# Altium PCB 平衡车.PcbDoc
Units mm, origin at the board's own origin, x right, y up, seen from the top; angles counter-clockwise.
Board outline 80 x 70 mm, 2 copper layers (Top Layer, Bottom Layer); 11 components, 28 nets, 91 pads, 9 vias.
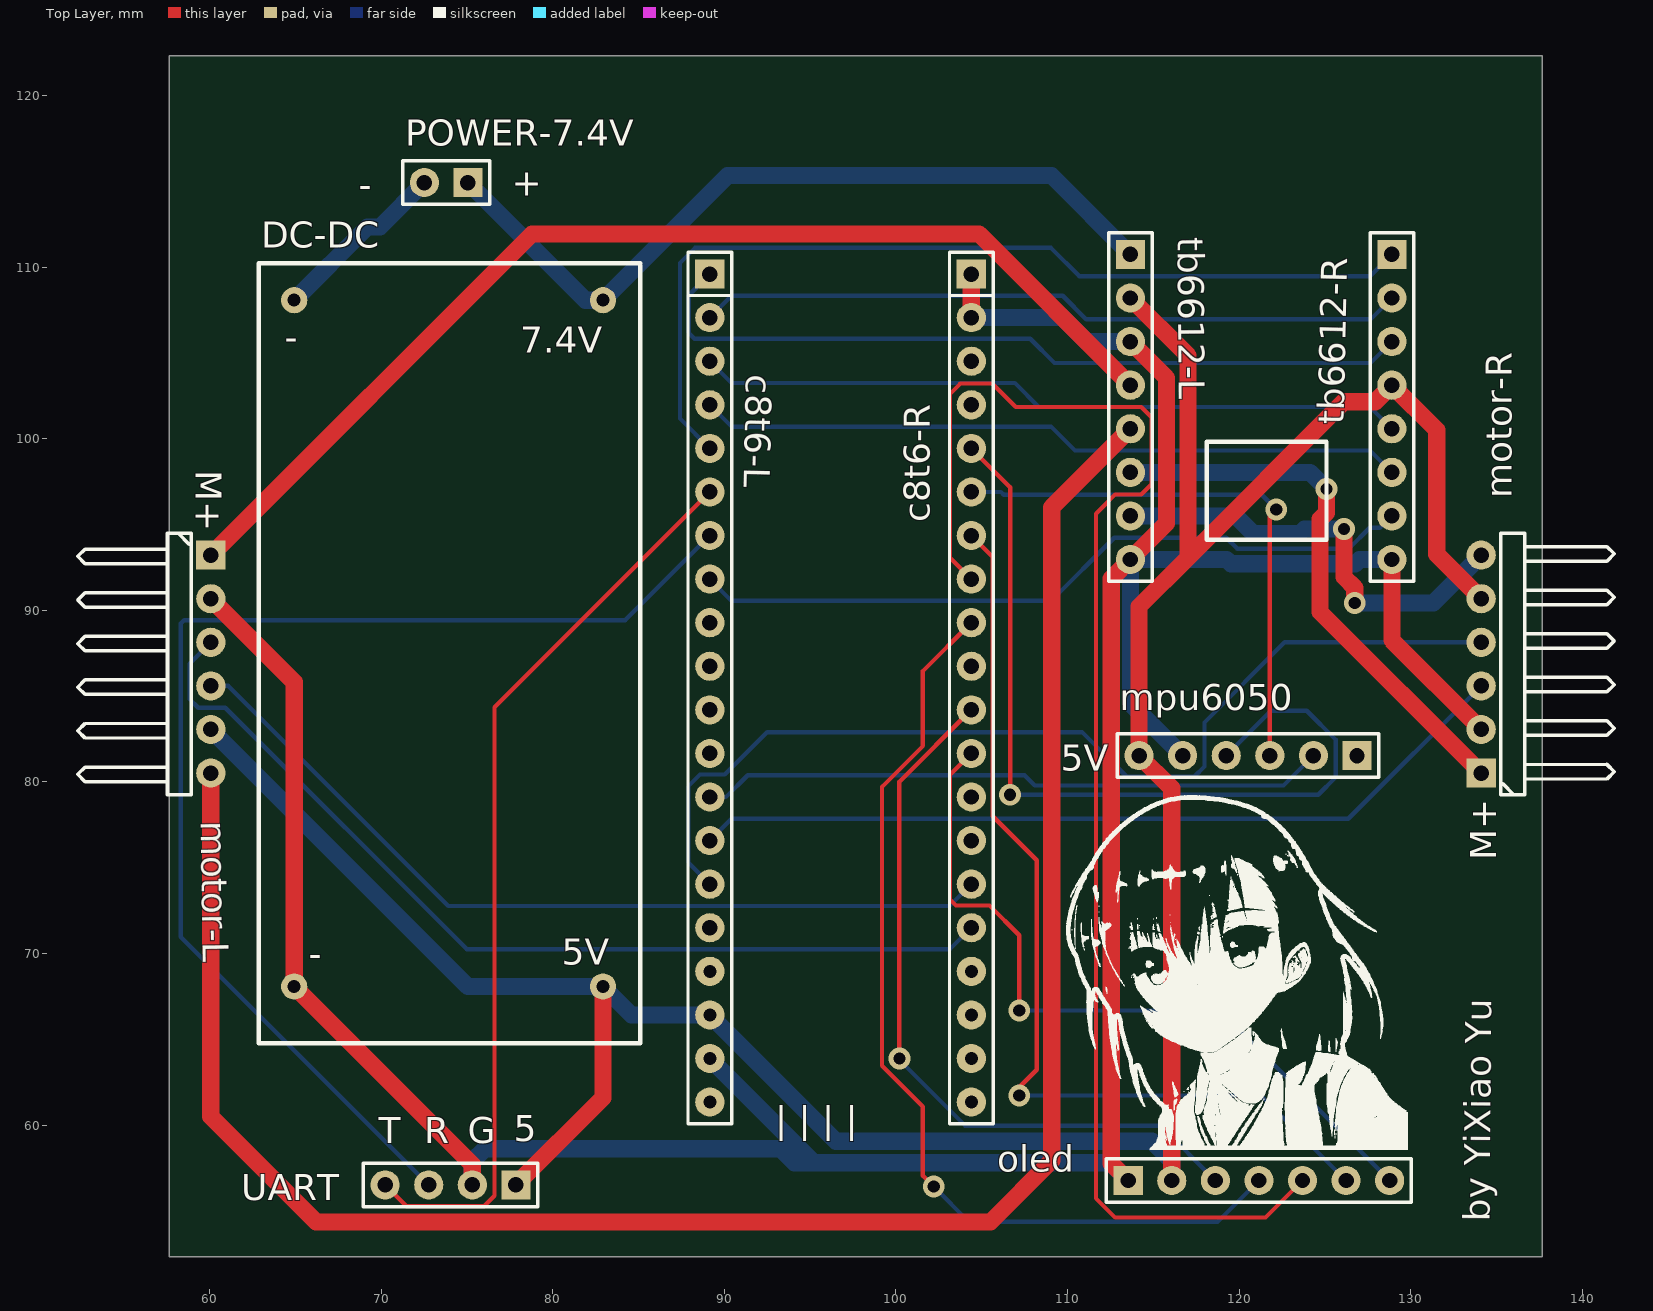
[diagram p0: Top Layer view]
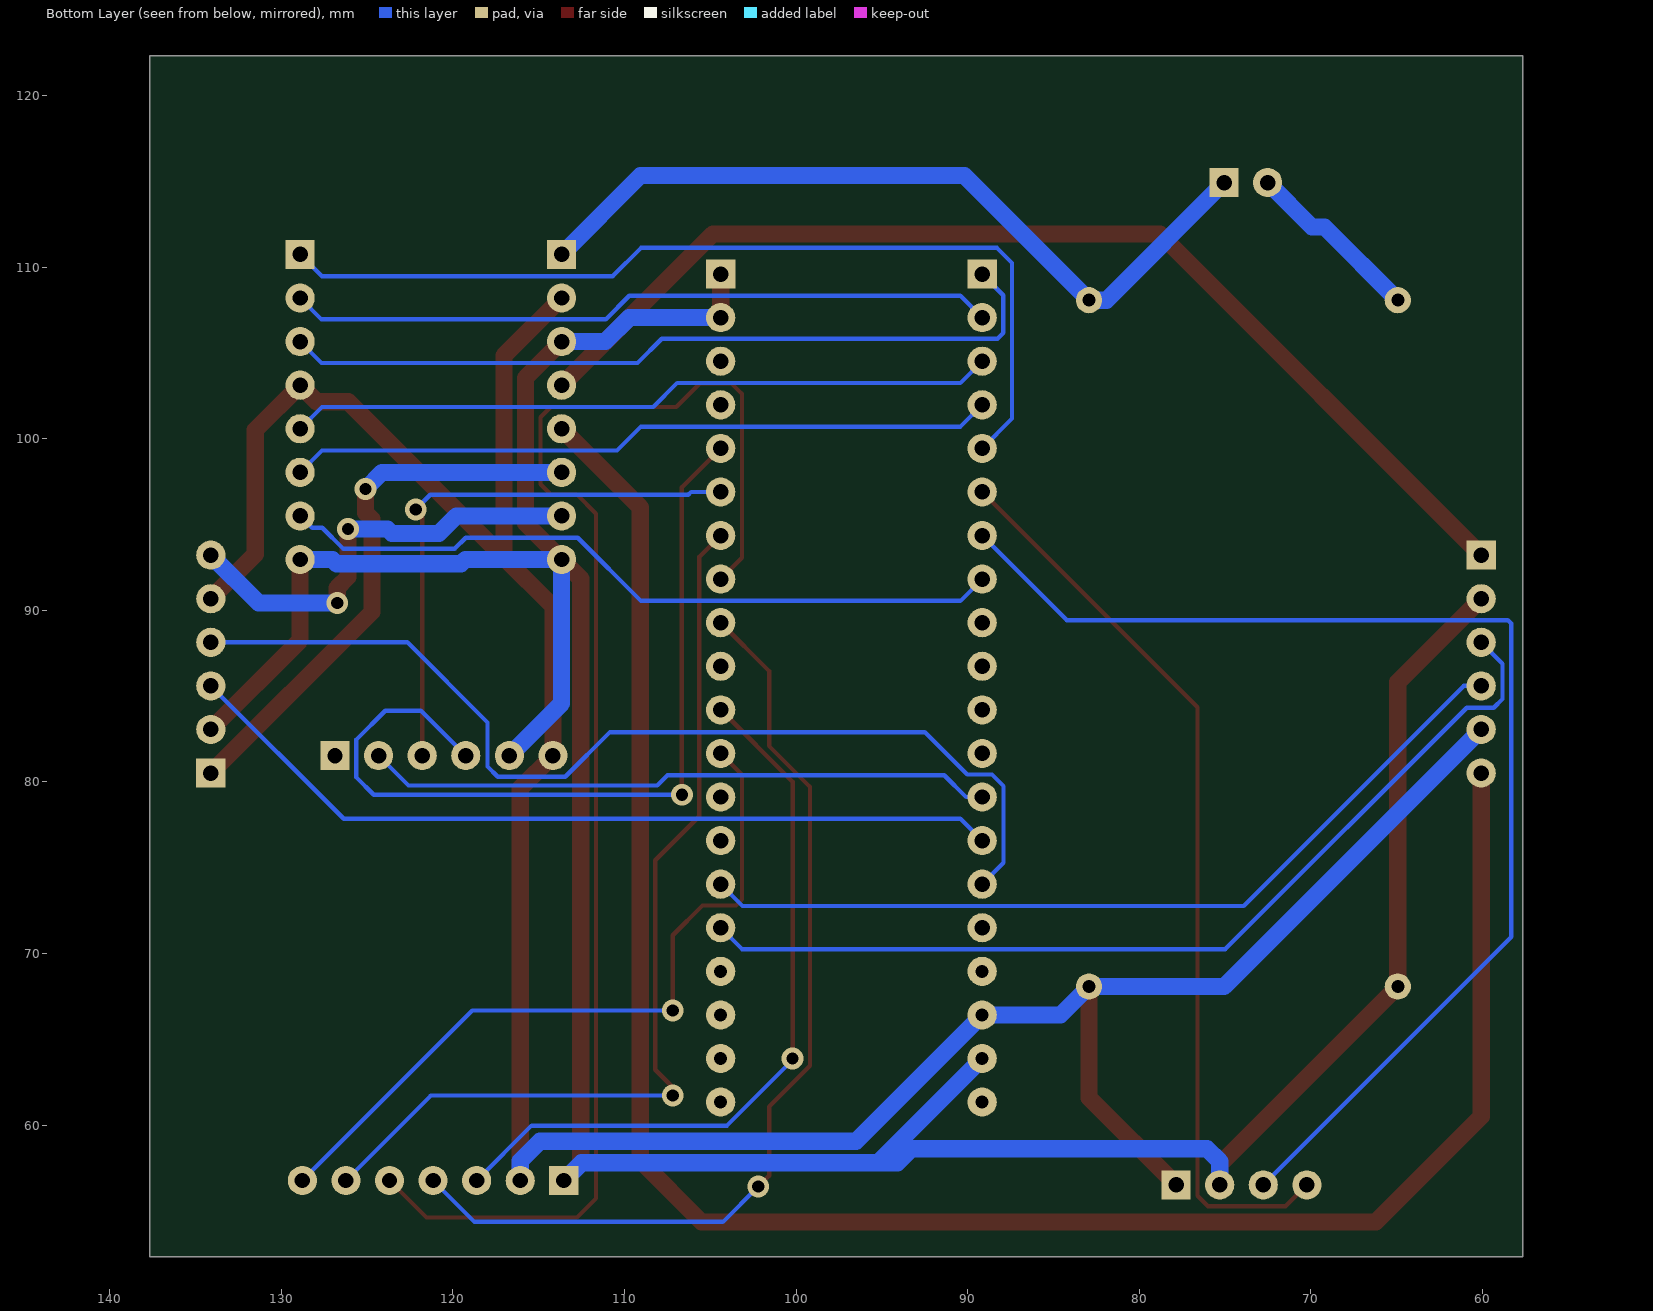
[diagram p1: Bottom Layer view, seen from below]

## Layer stack, top to bottom
Top Solder: solder mask 0.0102, Solder Resist, Dk 3.5
Top Layer: signal copper 0.0356
Dielectric 1: dielectric 0.32, FR-4, Dk 4.8
Bottom Layer: signal copper 0.0356
Bottom Solder: solder mask 0.0102, Solder Resist, Dk 3.5

## Board outline
57.658,52.324 137.658,52.324 137.658,122.324 57.658,122.324

## Design rules (kind name [scope] priority, off if disabled: settings)
Clearance [All] p1: gap=0.254 ignorepadtopadclearanceinfootprint=FALSE except(0: Arc-Hole Track-Hole SMDPad-Hole THPad-Hole Via-Hole Fill-Hole Poly-Hole Region-Hole Text-Hole)
PolygonConnect [All] p1: connectstyle=Relief reliefconductorwidth=0.254 reliefentries=4 polygonreliefangle="90 Angle" airgapwidth=0.254
RoutingVias [All] p1: holewidth=0.711 width=1.27 viastyle="Through Hole" minholewidth=0.711 minwidth=1.27 maxholewidth=0.711 maxwidth=1.27
SolderMaskExpansion [All] p1: expansion=0.102 istentingtop=FALSE
Width POW-Width [InNetClass('power')] p1: maxlimit=3 minlimit=0.254 preferedwidth=1 minimp=50.000000 maximp=50.000000 favimp=50.000000
Width [All] p2: maxlimit=0.254 minlimit=0.254 preferedwidth=0.254
30 further rules are at their usual default settings.

## Classes and differential pairs
net class POWER: 5V 7.4V GND GND7.4V ML+ ML- MR+ MR-

## Components (designator, comment, footprint, x,y, rotation, side; value= is the part's Value field where it differs from the comment)
c8t6-L "c8t6-L" HDR2.54-M-LI-20P 89.154,85.471 r270 top
c8t6-R "c8t6-R" HDR2.54-M-LI-20P 104.394,85.471 r270 top
DC-DC "DC-DC" DC-DC 82.931,108.077 r270 top
motor-L "motor-L" HDR2.54-WI-6P 60.071,86.868 r270 top
motor-R "motor-R" HDR2.54-WI-6P 134.112,86.868 r90 top
mpu6050 "mpu6050" HDR2.54-M-LI-6P 120.523,81.534 r180 top
oled "oled" HDR2.54-M-LI-7P 121.158,56.769 r0 top
POWER-7.4V "POWER-7.4V" HDR2.54-LI-2P 73.787,114.935 r180 top
tb6612-L "tb6612-L" HDR2.54-M-LI-8P 113.665,101.854 r270 top
tb6612-R "tb6612-R" HDR2.54-M-LI-8P 128.905,101.854 r270 top
UART "UART" HDR2.54-M-LI-4P 74.041,56.515 r180 top

## Footprints (in the part's own frame and the unit in brackets; to place one, negate y for a bottom-side part, rotate by r counter-clockwise, add the part's x,y. Pads: shape width x height; smd on the part's side, far side on the other; paste and mask are expansions set on the pad)
DC-DC [mil]
  round 60 hole 30: 1(0,0) 2(0,-708.66) 3(1574.8,0) 4(1574.8,-708.66)
  silkscreen extent -85,-790 1705,85
HDR2.54-LI-2P [mm] "排针，2脚                         联系卖家 免费查找封装"
  rect 1.7x1.7 hole 0.9: 1(-1.27,0)
  round 1.7 hole 0.9: 2(1.27,0)
  silkscreen extent -2.54,-1.27 2.54,1.27, body extent -2.54,-1.27 2.54,1.27, height 2.54
HDR2.54-M-LI-4P [mm] "排母，4脚"
  rect 1.7x1.7 hole 0.9: 1(-3.81,0)
  round 1.7 hole 0.9: 2(-1.27,0) 3(1.27,0) 4(3.81,0)
  silkscreen extent -5.08,-1.27 5.08,1.27, body extent -5.08,-1.27 5.08,1.27, height 8.5
HDR2.54-M-LI-6P [mm] "排母，6脚"
  rect 1.7x1.7 hole 0.9: 1(-6.35,0)
  round 1.7 hole 0.9: 2(-3.81,0) 3(-1.27,0) 4(1.27,0) 5(3.81,0) 6(6.35,0)
  silkscreen extent -7.62,-1.27 7.62,1.27, body extent -7.62,-1.27 7.62,1.27, height 8.5
HDR2.54-M-LI-7P [mm] "排母，7脚"
  rect 1.7x1.7 hole 0.9: 1(-7.62,0)
  round 1.7 hole 0.9: 2(-5.08,0) 3(-2.54,0) 4(0,0) 5(2.54,0) 6(5.08,0) 7(7.62,0)
  silkscreen extent -8.89,-1.27 8.89,1.27, body extent -8.89,-1.27 8.89,1.27, height 8.5
HDR2.54-M-LI-8P [mm] "排母，8脚"
  rect 1.7x1.7 hole 0.9: 1(-8.89,0)
  round 1.7 hole 0.9: 2(-6.35,0) 3(-3.81,0) 4(-1.27,0) 5(1.27,0) 6(3.81,0) 7(6.35,0) 8(8.89,0)
  silkscreen extent -10.16,-1.27 10.16,1.27, body extent -10.16,-1.27 10.16,1.27, height 8.5
HDR2.54-M-LI-20P [mm] "排母，20脚"
  rect 1.7x1.7 hole 0.9: 1(-24.13,0)
  round 1.7 hole 0.9: 2(-21.59,0) 3(-19.05,0) 4(-16.51,0) 5(-13.97,0) 6(-11.43,0) 7(-8.89,0) 8(-6.35,0) 9(-3.81,0) 10(-1.27,0) 11(1.27,0) 12(3.81,0) 13(6.35,0) 14(8.89,0) 15(11.43,0) 16(13.97,0)
  round 1.7 hole 0.762: 17(16.51,0) 18(19.05,0) 19(21.59,0) 20(24.13,0)
  silkscreen extent -25.4,-1.27 25.4,1.27, body extent -25.4,-1.27 25.4,1.27, height 8.5
HDR2.54-WI-6P [mm] "弯脚排针，6脚"
  rect 1.7x1.7 hole 0.9: 1(-6.35,0)
  round 1.7 hole 0.9: 2(-3.81,0) 3(-1.27,0) 4(1.27,0) 5(3.81,0) 6(6.35,0)
  silkscreen extent -7.62,-7.76 7.62,-1.14, body extent -7.62,-7.77 7.62,1.27, height 4.9

## Via types
v1: diameter 1.27, hole 0.711, Top Layer to Bottom Layer, 9 vias

## Nets (pads, with @x,y where several pads share a name; then routed paths per layer and width w, separated by ;. In a path a pad name is that pad's centre, name@x,y a point inside that pad or via, vN(x,y) a via of type N, cw(c..) or ccw(c..) an arc to the next point about the centre after c; other vN are vias at no path point)
5V: c8t6-L.18 DC-DC.3 motor-L.5 motor-R.5 mpu6050.6 oled.2 tb6612-L.2 tb6612-R.4 UART.1 | length 166.7
  Top Layer w1: UART.1 82.931,61.595 DC-DC.3 ; tb6612-L.2 117.031,104.838 117.031,93.085 ; oled.2 116.078,79.629 mpu6050.6 114.173,90.227 117.031,93.085 ; motor-R.5 131.521,93.269 131.521,100.508 tb6612-R.4 127.94,102.159 126.104,102.159 117.031,93.085
  Bottom Layer w1: motor-L.5 75.052,68.077 DC-DC.3 84.587,66.421 c8t6-L.18 96.514,59.061 114.929,59.061 116.078,57.912 oled.2
7.4V: DC-DC.1 POWER-7.4V.1 tb6612-L.1 | length 46.4
  Bottom Layer w1: POWER-7.4V.1 81.915,108.077 DC-DC.1 90.195,115.341 109.068,115.341 tb6612-L.1
A0: c8t6-R.16 motor-L.3 | length 55.9
  Bottom Layer w0.254: motor-L.3 58.826,86.893 58.826,84.836 59.334,84.328 60.909,84.328 74.981,70.256 103.149,70.256 c8t6-R.16
A1: c8t6-R.15 motor-L.4 | length 50.2
  Bottom Layer w0.254: motor-L.4 61.081,85.598 73.908,72.771 103.124,72.771 c8t6-R.15
A4: c8t6-R.12 oled.7 | length 44
  Top Layer w0.254: c8t6-R.12 103.149,80.416 103.149,73.152 103.505,72.796 105.454,72.796 107.188,71.062 v1(107.188,66.675)
  Bottom Layer w0.254: v1(107.188,66.675) 118.872,66.675 oled.7
A5: c8t6-R.11 oled.3 | length 43.5
  Top Layer w0.254: v1(100.203,63.881) 100.203,80.01 c8t6-R.11
  Bottom Layer w0.254: v1(100.203,63.881) 100.203,63.791 104.025,59.969 115.418,59.969 oled.3
A7: c8t6-R.9 oled.4 | length 57.1
  Top Layer w0.254: v1(102.21,56.413) 101.575,57.048 101.575,61.073 99.187,63.46 99.187,79.712 101.575,82.1 101.575,86.462 c8t6-R.9
  Bottom Layer w0.254: v1(102.21,56.413) 104.267,54.356 118.745,54.356 oled.4
A8: c8t6-L.5 tb6612-R.1 | length 54.6
  Bottom Layer w0.254: c8t6-L.5 87.415,101.18 87.415,110.25 88.29,111.125 109.042,111.125 110.693,109.474 127.635,109.474 tb6612-R.1
A9: c8t6-L.6 UART.4 | length 53.4
  Top Layer w0.254: UART.4 71.476,55.27 75.997,55.27 76.606,55.88 76.606,84.353 c8t6-L.6
A10: c8t6-L.7 UART.3 | length 71.7
  Bottom Layer w0.254: UART.3 58.318,70.968 58.318,89.23 58.522,89.433 84.226,89.433 c8t6-L.7
A11: c8t6-L.8 tb6612-R.7 | length 42.9
  Bottom Layer w0.254: c8t6-L.8 90.424,90.551 109.042,90.551 112.725,94.234 119.26,94.234 119.896,93.598 126.404,93.598 127.615,94.809 128.21,94.809 tb6612-R.7
B0: c8t6-R.8 oled.5 | length 85.3
  Top Layer w0.254: c8t6-R.8 103.149,93.066 103.149,102.616 103.759,103.226 105.613,103.226 106.985,101.854 114.3,101.854 114.896,101.258 114.896,97.345 114.3,96.749 112.776,96.749 111.658,95.631 111.658,55.728 112.776,54.61 121.539,54.61 oled.5
B1: c8t6-R.7 oled.6 | length 55.7
  Top Layer w0.254: c8t6-R.7 105.639,93.116 105.639,78.003 108.204,75.438 108.204,63.221 107.188,62.205 v1(107.188,61.722)
  Bottom Layer w0.254: v1(107.188,61.722) 121.285,61.722 oled.6
B5: c8t6-L.13 mpu6050.2 | length 36.7
  Bottom Layer w0.254: c8t6-L.13 90.092,79.121 91.362,80.391 107.493,80.391 108.089,79.795 122.594,79.795 mpu6050.2
B6: c8t6-L.14 motor-R.3 | length 48.7
  Bottom Layer w0.254: c8t6-L.14 90.424,77.851 126.365,77.851 motor-R.3
B7: c8t6-L.15 motor-R.4 | length 59.6
  Bottom Layer w0.254: c8t6-L.15 87.909,75.286 87.909,79.756 88.583,80.43 90.031,80.43 92.507,82.906 110.846,82.906 113.448,80.303 117.387,80.303 117.983,80.899 117.983,83.464 122.657,88.138 motor-R.4
B10: c8t6-R.6 mpu6050.3 | length 32.7
  Top Layer w0.254: mpu6050.3 121.793,95.504 v1(122.174,95.885)
  Bottom Layer w0.254: c8t6-R.6 106.121,96.901 106.287,96.735 121.324,96.735 v1(122.174,95.885)
B11: c8t6-R.5 mpu6050.4 | length 50.9
  Top Layer w0.254: c8t6-R.5 106.655,97.18 v1(106.655,79.248)
  Bottom Layer w0.254: v1(106.655,79.248) 124.612,79.248 125.628,80.264 125.628,82.474 123.952,84.15 121.869,84.15 mpu6050.4
B12: c8t6-L.1 tb6612-R.3 | length 46.2
  Bottom Layer w0.254: c8t6-L.1 87.923,108.37 87.923,106.172 88.265,105.83 107.835,105.83 109.245,104.419 127.66,104.419 tb6612-R.3
B13: c8t6-L.2 tb6612-R.2 | length 41.4
  Bottom Layer w0.254: c8t6-L.2 90.424,108.331 109.728,108.331 111.1,106.959 127.66,106.959 tb6612-R.2
B14: c8t6-L.3 tb6612-R.5 | length 41.4
  Bottom Layer w0.254: c8t6-L.3 90.424,103.251 106.934,103.251 108.331,101.854 127.635,101.854 tb6612-R.5
B15: c8t6-L.4 tb6612-R.6 | length 41.4
  Bottom Layer w0.254: c8t6-L.4 90.424,100.711 109.042,100.711 110.439,99.314 127.635,99.314 tb6612-R.6
GND: c8t6-L.19 c8t6-R.1 c8t6-R.2 DC-DC.4 motor-L.2 motor-R.2 mpu6050.5 oled.1 tb6612-L.3 tb6612-L.8 tb6612-R.8 UART.2 | length 193.8
  Top Layer w1: motor-L.2 64.931,85.818 DC-DC.4 75.311,57.697 UART.2 ; c8t6-R.2 c8t6-R.1 ; oled.1 112.547,57.76 112.547,91.846 tb6612-L.8 115.777,95.076 115.777,103.552 tb6612-L.3 ; tb6612-R.8 128.905,88.265 motor-R.2
  Bottom Layer w1: UART.2 75.311,57.887 76.048,58.623 93.269,58.623 94.085,57.807 95.228,57.807 ; c8t6-L.19 95.228,57.807 ; c8t6-R.2 109.728,107.061 111.125,105.664 tb6612-L.3 ; oled.1 112.5,57.807 95.228,57.807 ; mpu6050.5 113.665,84.582 tb6612-L.8 119.278,92.964 119.526,92.717 126.769,92.717 127.016,92.964 tb6612-R.8
GND7.4V: DC-DC.2 POWER-7.4V.2 | length 10.4
  Bottom Layer w1: DC-DC.2 69.198,112.344 69.926,112.344 POWER-7.4V.2
ML+: motor-L.1 tb6612-L.4 | length 65
  Top Layer w1: motor-L.1 78.791,111.938 104.851,111.938 tb6612-L.4
ML-: motor-L.6 tb6612-L.5 | length 117.6
  Top Layer w1: motor-L.6 60.071,60.503 66.218,54.356 105.512,54.356 109.085,57.929 109.085,96.004 tb6612-L.5
MR+: motor-R.1 tb6612-L.6 | length 32.4
  Top Layer w1: v1(125.095,97.079) 125.095,95.69 124.722,95.317 124.722,89.908 motor-R.1
  Bottom Layer w1: tb6612-L.6 124.13,98.044 v1(125.095,97.079)
MR-: motor-R.6 tb6612-L.7 | length 26.1
  Top Layer w1: v1(126.111,94.742) 126.111,91.948 126.746,91.313 v1(126.746,90.424)
  Bottom Layer w1: tb6612-L.7 119.803,95.504 120.828,94.479 123.554,94.479 123.818,94.742 v1(126.111,94.742) ; v1(126.746,90.424) 131.318,90.424 motor-R.6
pads on no net: c8t6-L.9 c8t6-L.10 c8t6-L.11 c8t6-L.12 c8t6-L.16 c8t6-L.17 c8t6-L.20 c8t6-R.3 c8t6-R.4 c8t6-R.10 c8t6-R.13 c8t6-R.14 c8t6-R.17 c8t6-R.18 c8t6-R.19 c8t6-R.20 mpu6050.1

## Silkscreen, mask and mechanical layers (free items; w line width, h text height)
Top Overlay:
  drawing of 7617 lines, arcs and shapes, not listed
  text "+" at 77.597,114.173 h1.52
  text "-" at 68.707,114.046 h1.52
  text "-" at 64.389,105.156 h1.52
  text "7.4V" at 78.105,105.029 h1.52
  text "M+" at 59.182,98.171 h1.52 r270
  text "5V" at 109.601,80.645 h1.52
  text "M+" at 135.001,75.438 h1.52 r90
  text "5V" at 80.518,69.342 h1.52
  text "-" at 65.786,69.215 h1.52
  text "| | | |" at 92.964,59.563 h1.52
  text "5" at 77.724,59.055 h1.52
  text "T" at 69.85,58.928 h1.52
  text "R" at 72.517,58.928 h1.52
  text "G" at 75.057,58.928 h1.52
  text "by YiXiao Yu" at 134.622,54.362 h1.52 r89.55
Mechanical 1:
  the board outline again, w0.254